# Altium PCB 8bit_RAM.PcbDoc (part 1 of 2)
Units mm, origin at the board's own origin, x right, y up, seen from the top; angles counter-clockwise.
Board outline 237.42 x 196.8 mm, 2 copper layers (Top Layer, Bottom Layer); 76 components, 66 nets, 496 pads, 273 vias.
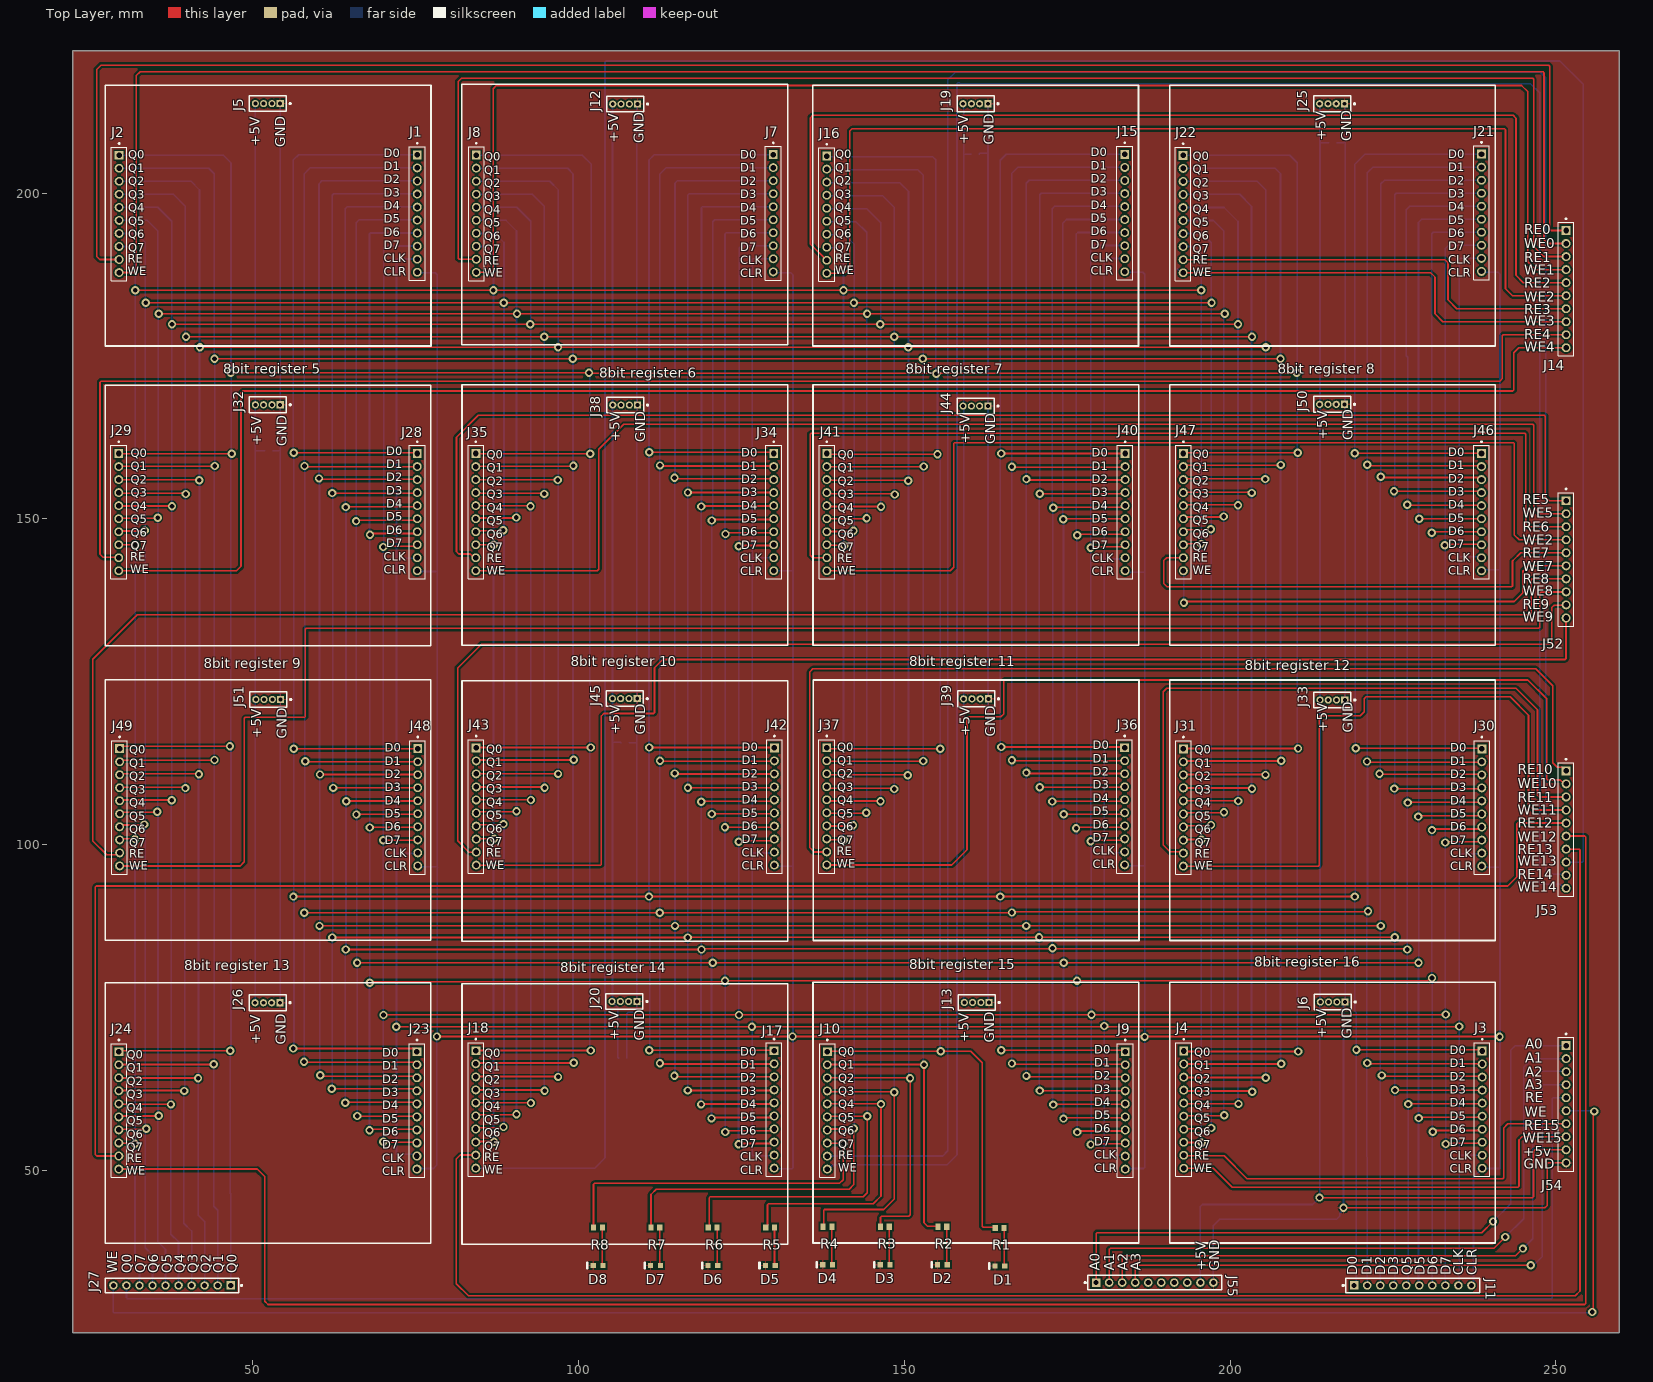
[diagram p0: Top Layer view]
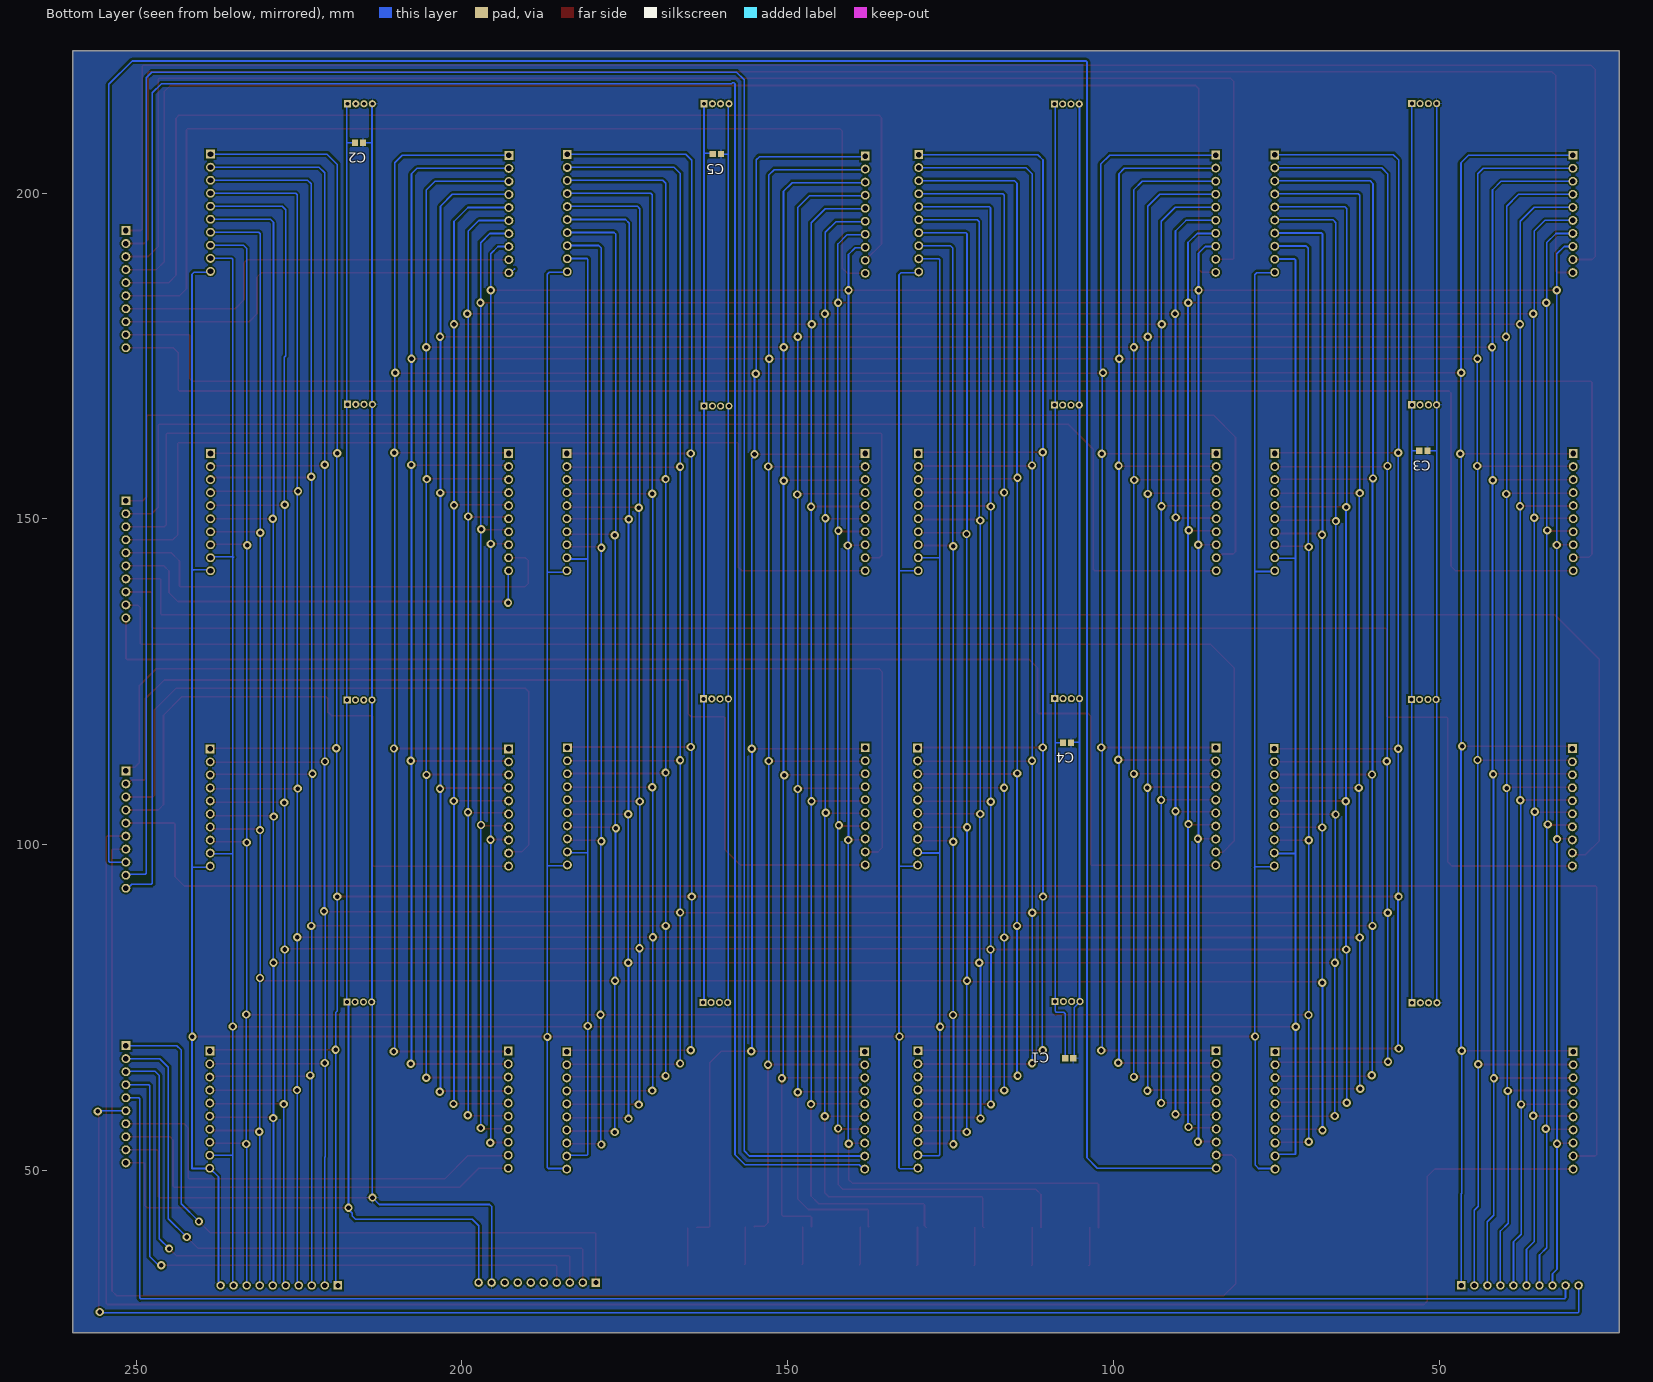
[diagram p1: Bottom Layer view, seen from below]
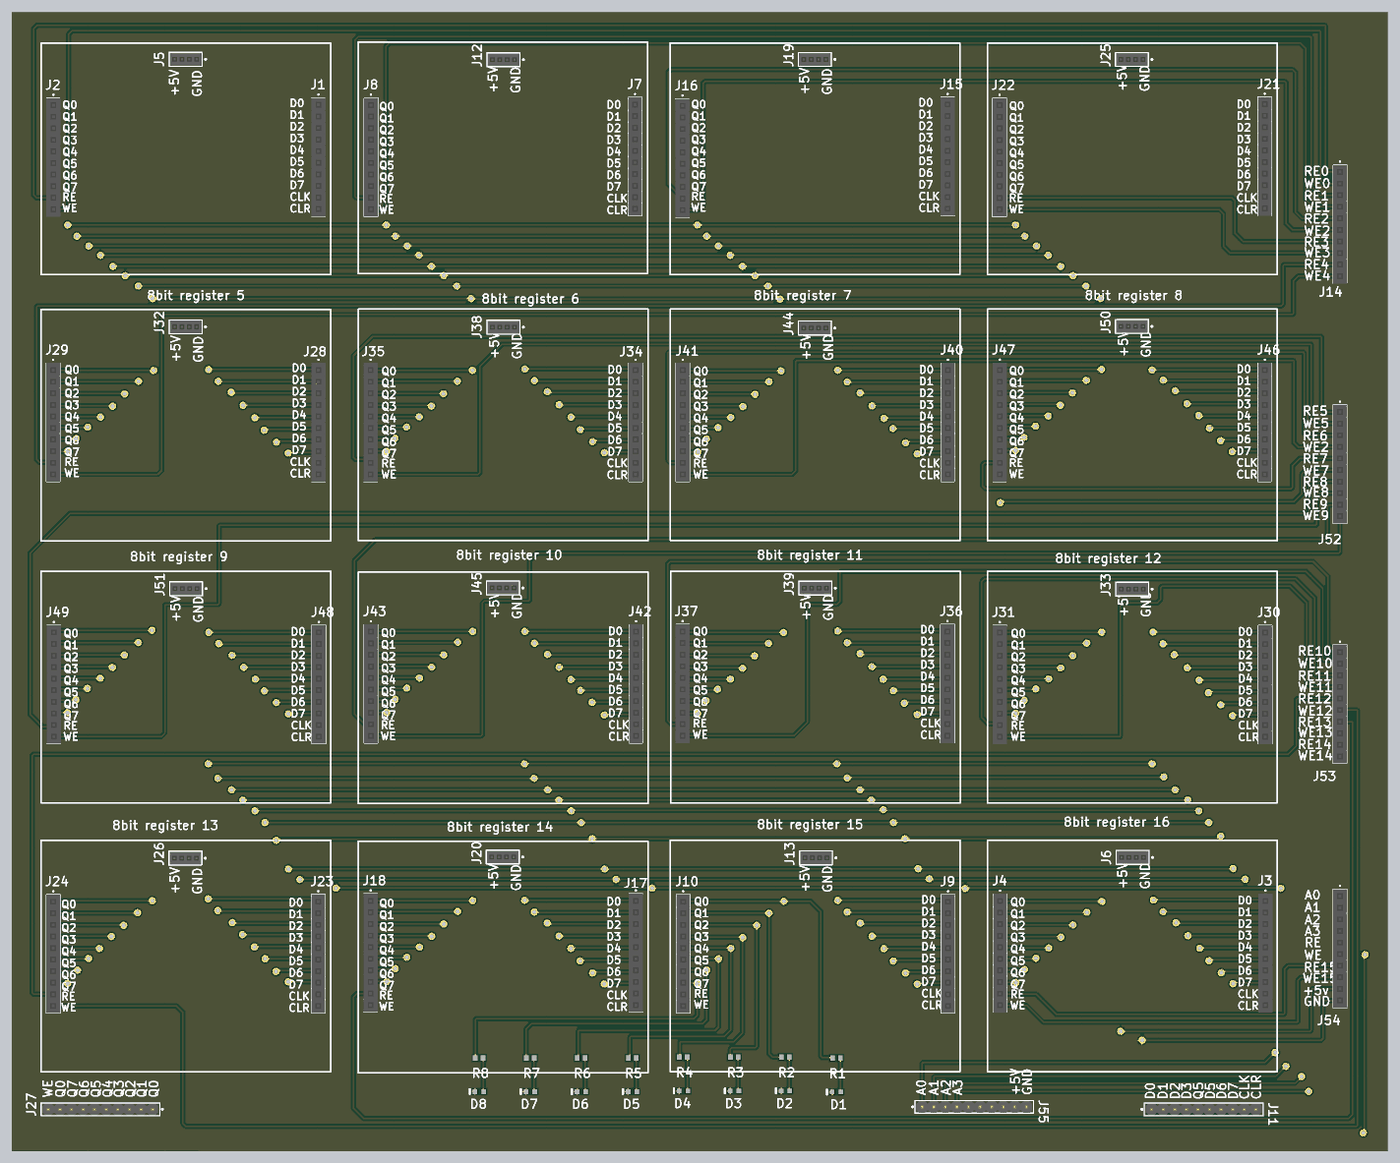
[diagram p3: 3D render of the assembled board from above, using the file's embedded part models]
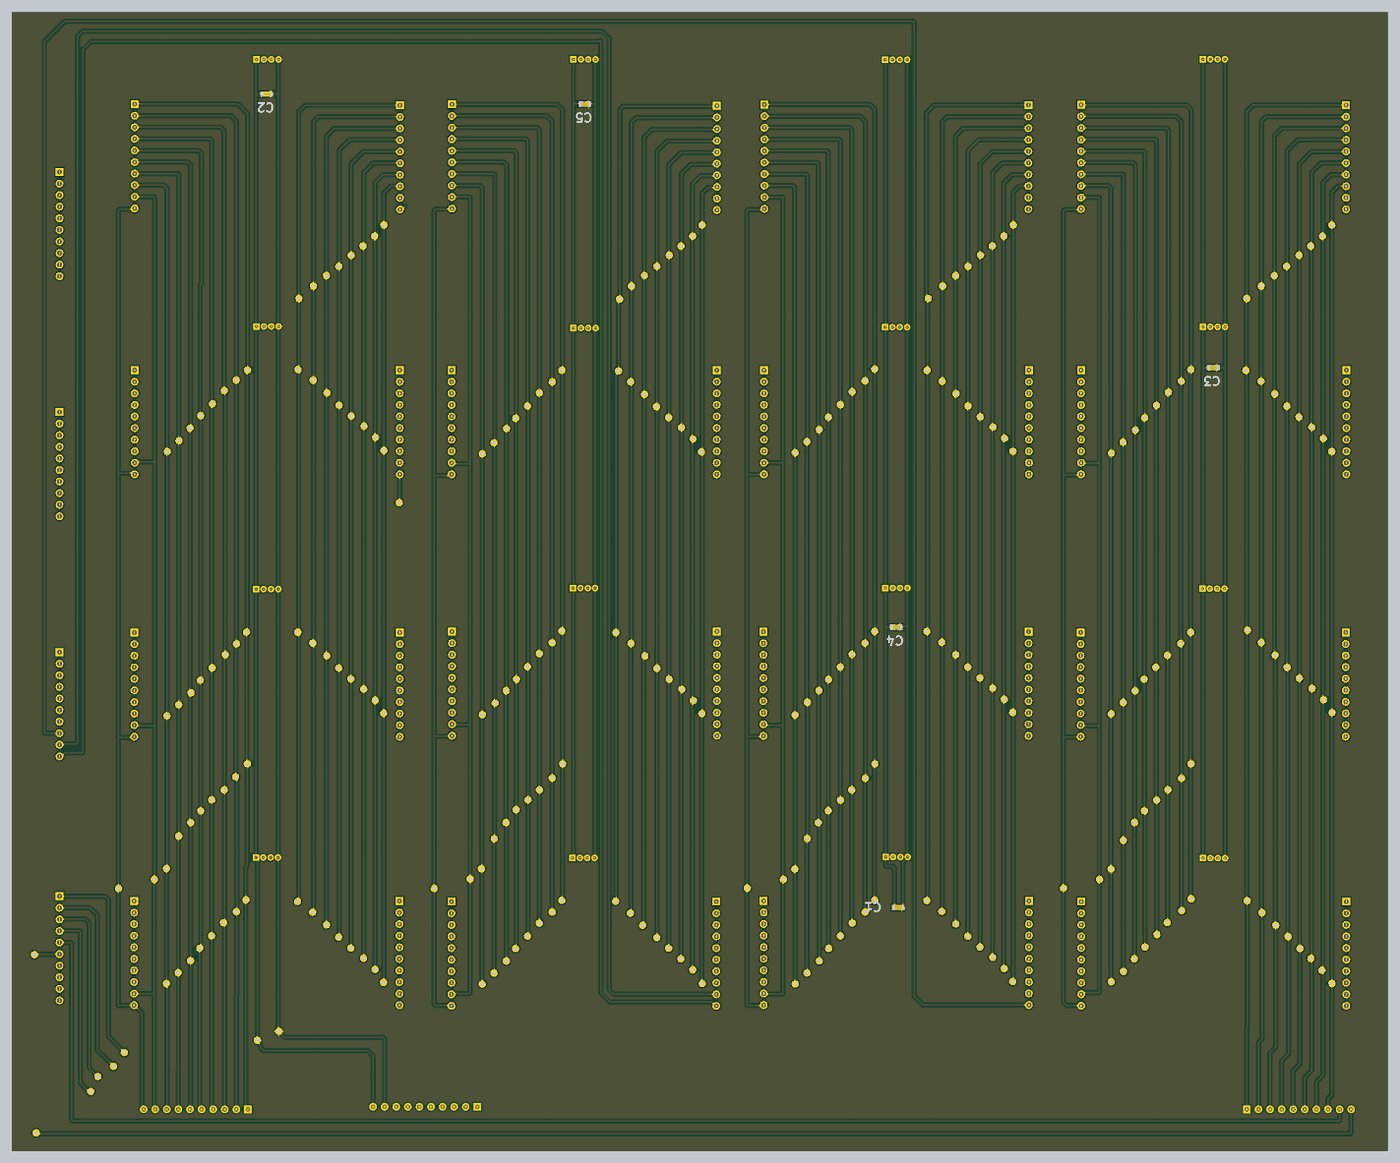
[diagram p4: 3D render of the assembled board from below, using the file's embedded part models]

## Layer stack, top to bottom
Top Solder: solder mask 0.0102, Solder Resist, Dk 3.5
Top Layer: signal copper 0.0356
Dielectric 1: dielectric 0.32, FR-4, Dk 4.8
Bottom Layer: signal copper 0.0356
Bottom Solder: solder mask 0.0102, Solder Resist, Dk 3.5

## Board outline
22.35,25.075 22.35,221.875 259.775,221.875 259.775,25.075

## Design rules (kind name [scope] priority, off if disabled: settings)
Clearance [All] p1: gap=0.254 ignorepadtopadclearanceinfootprint=FALSE
PolygonConnect [All] p1: connectstyle=Relief reliefconductorwidth=0.254 reliefentries=4 polygonreliefangle="90 Angle" airgapwidth=0.254
RoutingVias [All] p1: holewidth=0.711 width=1.27 viastyle="Through Hole" minholewidth=0.711 minwidth=1.27 maxholewidth=0.711 maxwidth=1.27
SolderMaskExpansion [All] p1: expansion=0.102 istentingtop=FALSE
SupplyNets "Schematic Supply Nets_1" [InNet('+5')] p1: voltage=0.000
SupplyNets "Schematic Supply Nets" [InNet('GND')] p2: voltage=0.000
Width [All] p1: maxlimit=0.254 minlimit=0.254 preferedwidth=0.254
30 further rules are at their usual default settings.

## Components (designator, comment, footprint, x,y, rotation, side; value= is the part's Value field where it differs from the comment)
C1 "Capacitor 100 nF +/-10% 50 V 0603" CAPC1608X90X40NL10T20 106.8,67.2 r180 bottom value=100nF
C2 "Capacitor 100 nF +/-10% 50 V 0603" CAPC1608X90X40NL10T20 215.8,207.725 r0 bottom value=100nF
C3 "Capacitor 100 nF +/-10% 50 V 0603" CAPC1608X90X40NL10T20 52.45,160.45 r0 bottom value=100nF
C4 "Capacitor 100 nF +/-10% 50 V 0603" CAPC1608X90X40NL10T20 107.15,115.625 r0 bottom value=100nF
C5 "Capacitor 100 nF +/-10% 50 V 0603" CAPC1608X90X40NL10T20 160.875,205.975 r0 bottom value=100nF
D1 "19-217/R6C-AL1M2VY/3T" EVRL-0603-2_V 164.675,35.325 r180 top
D2 "19-217/R6C-AL1M2VY/3T" EVRL-0603-2_V 155.867,35.525 r180 top
D3 "19-217/R6C-AL1M2VY/3T" EVRL-0603-2_V 147.059,35.525 r180 top
D4 "19-217/R6C-AL1M2VY/3T" EVRL-0603-2_V 138.251,35.525 r180 top
D5 "19-217/R6C-AL1M2VY/3T" EVRL-0603-2_V 129.443,35.4 r180 top
D6 "19-217/R6C-AL1M2VY/3T" EVRL-0603-2_V 120.636,35.4 r180 top
D7 "19-217/R6C-AL1M2VY/3T" EVRL-0603-2_V 111.828,35.4 r180 top
D8 "19-217/R6C-AL1M2VY/3T" EVRL-0603-2_V 103.02,35.4 r180 top
J1 "NPPN101BFCN-RC" SULLINS_NPPN101BFCN-RC 75.25,196.85 r90 top
J2 "NPPN101BFCN-RC" SULLINS_NPPN101BFCN-RC 29.5,196.8 r90 top
J3 "NPPN101BFCN-RC" SULLINS_NPPN101BFCN-RC 238.7,59.325 r90 top
J4 "NPPN101BFCN-RC" SULLINS_NPPN101BFCN-RC 192.9,59.325 r90 top
J5 "LPPB041NFFN-RC" FP-LPPB041NFFN-RC-MFG 52.315,213.725 r180 top
J6 "LPPB041NFFN-RC" FP-LPPB041NFFN-RC-MFG 215.765,75.85 r180 top
J7 "NPPN101BFCN-RC" SULLINS_NPPN101BFCN-RC 129.9,196.9 r90 top
J8 "NPPN101BFCN-RC" SULLINS_NPPN101BFCN-RC 84.325,196.825 r90 top
J9 "NPPN101BFCN-RC" SULLINS_NPPN101BFCN-RC 183.925,59.2 r90 top
J10 "NPPN101BFCN-RC" SULLINS_NPPN101BFCN-RC 138.2,59.2 r90 top
J11 "NRPN101PAEN-RC" FP-NRPN101PAEN-RC-MFG 228.05,32.339 r0 top
J12 "LPPB041NFFN-RC" FP-LPPB041NFFN-RC-MFG 107.175,213.65 r180 top
J13 "LPPB041NFFN-RC" FP-LPPB041NFFN-RC-MFG 161.125,75.775 r180 top
J14 "NPPN101BFCN-RC" SULLINS_NPPN101BFCN-RC 251.575,185.252 r90 top
J15 "NPPN101BFCN-RC" SULLINS_NPPN101BFCN-RC 183.85,196.925 r90 top
J16 "NPPN101BFCN-RC" SULLINS_NPPN101BFCN-RC 138.1,196.675 r90 top
J17 "NPPN101BFCN-RC" SULLINS_NPPN101BFCN-RC 130.025,59.35 r90 top
J18 "NPPN101BFCN-RC" SULLINS_NPPN101BFCN-RC 84.25,59.35 r90 top
J19 "LPPB041NFFN-RC" FP-LPPB041NFFN-RC-MFG 160.94,213.7 r180 top
J20 "LPPB041NFFN-RC" FP-LPPB041NFFN-RC-MFG 107.065,75.925 r180 top
J21 "NPPN101BFCN-RC" SULLINS_NPPN101BFCN-RC 238.6,196.975 r90 top
J22 "NPPN101BFCN-RC" SULLINS_NPPN101BFCN-RC 192.8,196.775 r90 top
J23 "NPPN101BFCN-RC" SULLINS_NPPN101BFCN-RC 75.216,59.207 r90 top
J24 "NPPN101BFCN-RC" SULLINS_NPPN101BFCN-RC 29.466,59.207 r90 top
J25 "LPPB041NFFN-RC" FP-LPPB041NFFN-RC-MFG 215.665,213.7 r180 top
J26 "LPPB041NFFN-RC" FP-LPPB041NFFN-RC-MFG 52.281,75.732 r180 top
J27 "NRPN101PAEN-RC" FP-NRPN101PAEN-RC-MFG 37.625,32.339 r180 top
J28 "NPPN101BFCN-RC" SULLINS_NPPN101BFCN-RC 75.25,151.025 r90 top
J29 "NPPN101BFCN-RC" SULLINS_NPPN101BFCN-RC 29.45,151.025 r90 top
J30 "NPPN101BFCN-RC" SULLINS_NPPN101BFCN-RC 238.65,105.7 r90 top
J31 "NPPN101BFCN-RC" SULLINS_NPPN101BFCN-RC 192.85,105.7 r90 top
J32 "LPPB041NFFN-RC" FP-LPPB041NFFN-RC-MFG 52.315,167.5 r180 top
J33 "LPPB041NFFN-RC" FP-LPPB041NFFN-RC-MFG 215.715,122.2 r180 top
J34 "NPPN101BFCN-RC" SULLINS_NPPN101BFCN-RC 129.975,151.025 r90 top
J35 "NPPN101BFCN-RC" SULLINS_NPPN101BFCN-RC 84.25,151.025 r90 top
J36 "NPPN101BFCN-RC" SULLINS_NPPN101BFCN-RC 183.825,105.875 r90 top
J37 "NPPN101BFCN-RC" SULLINS_NPPN101BFCN-RC 138.1,105.875 r90 top
J38 "LPPB041NFFN-RC" FP-LPPB041NFFN-RC-MFG 107.175,167.45 r180 top
J39 "LPPB041NFFN-RC" FP-LPPB041NFFN-RC-MFG 161.025,122.375 r180 top
J40 "NPPN101BFCN-RC" SULLINS_NPPN101BFCN-RC 183.9,151.025 r90 top
J41 "NPPN101BFCN-RC" SULLINS_NPPN101BFCN-RC 138.125,151.025 r90 top
J42 "NPPN101BFCN-RC" SULLINS_NPPN101BFCN-RC 130.075,105.85 r90 top
J43 "NPPN101BFCN-RC" SULLINS_NPPN101BFCN-RC 84.3,105.85 r90 top
J44 "LPPB041NFFN-RC" FP-LPPB041NFFN-RC-MFG 160.94,167.3 r180 top
J45 "LPPB041NFFN-RC" FP-LPPB041NFFN-RC-MFG 107.115,122.4 r180 top
J46 "NPPN101BFCN-RC" SULLINS_NPPN101BFCN-RC 238.6,151.025 r90 top
J47 "NPPN101BFCN-RC" SULLINS_NPPN101BFCN-RC 192.85,151.025 r90 top
J48 "NPPN101BFCN-RC" SULLINS_NPPN101BFCN-RC 75.325,105.725 r90 top
J49 "NPPN101BFCN-RC" SULLINS_NPPN101BFCN-RC 29.575,105.725 r90 top
J50 "LPPB041NFFN-RC" FP-LPPB041NFFN-RC-MFG 215.665,167.575 r180 top
J51 "LPPB041NFFN-RC" FP-LPPB041NFFN-RC-MFG 52.39,122.275 r180 top
J52 "NPPN101BFCN-RC" SULLINS_NPPN101BFCN-RC 251.575,143.781 r90 top
J53 "NPPN101BFCN-RC" SULLINS_NPPN101BFCN-RC 251.575,102.31 r90 top
J54 "NPPN101BFCN-RC" SULLINS_NPPN101BFCN-RC 251.575,60.152 r90 top
J55 "NRPN101PAEN-RC" FP-NRPN101PAEN-RC-MFG 188.45,32.775 r0 top
R1 "ERJ-3RQFR56V" RESC1608X55X30NL15T15 164.65,41.175 r0 top
R2 "ERJ-3RQFR56V" RESC1608X55X30NL15T15 155.842,41.35 r0 top
R3 "ERJ-3RQFR56V" RESC1608X55X30NL15T15 147.034,41.35 r0 top
R4 "ERJ-3RQFR56V" RESC1608X55X30NL15T15 138.226,41.35 r0 top
R5 "ERJ-3RQFR56V" RESC1608X55X30NL15T15 129.418,41.225 r0 top
R6 "ERJ-3RQFR56V" RESC1608X55X30NL15T15 120.611,41.225 r0 top
R7 "ERJ-3RQFR56V" RESC1608X55X30NL15T15 111.803,41.225 r0 top
R8 "ERJ-3RQFR56V" RESC1608X55X30NL15T15 102.995,41.225 r0 top

## Footprints (in the part's own frame and the unit in brackets; to place one, negate y for a bottom-side part, rotate by r counter-clockwise, add the part's x,y. Pads: shape width x height; smd on the part's side, far side on the other; paste and mask are expansions set on the pad)
CAPC1608X90X40NL10T20 [mm] "Chip Capacitor, 2-Leads, Body 1.70x0.90mm, IPC Medium Density"
  rect 0.95x0.95 smd: 1(-0.625,0) 2(0.625,0)
  body extent -0.85,-0.45 0.85,0.45, height 0.9
EVRL-0603-2_V [mm] "SMD, 2-Leads, Body 1.6x0.8mm"
  rect 0.8x0.8 smd: 1(-0.75,0) 2(0.75,0)
  silkscreen extent 1.65,-0.4 1.65,0.4, body extent -0.8,-0.4 0.8,0.4, height 0.5
FP-LPPB041NFFN-RC-MFG [mm]
  rect 1.1x1.1 hole 0.6 paste-2539.97 mask+0: 1(-1.905,0)
  round 1.1 hole 0.6 paste-2539.97 mask+0: 2(-0.635,0) 3(0.635,0) 4(1.905,0)
  silkscreen extent -3.57,-1.2 2.84,1.2, body extent -2.94,-1.3 2.94,1.3, height 0.25
FP-NRPN101PAEN-RC-MFG [mm]
  rect 1.3x1.3 hole 0.8 paste-2539.97 mask+0: 1(-9,0)
  round 1.3 hole 0.8 paste-2539.97 mask+0: 2(-7,0) 3(-5,0) 4(-3,0) 5(-1,0) 6(1,0) 7(3,0) 8(5,0) 9(7,0) 10(9,0)
  silkscreen extent -10.8,-1.1 10.25,1.1, body extent -10.35,-1.2 10.35,1.2, height 0.25
RESC1608X55X30NL15T15 [mm] "Chip Resistor, 2-Leads, Body 1.60x0.80mm, IPC Medium Density"
  rect 0.8x0.95 smd: 1(-0.675,0) 2(0.675,0)
  body extent -0.87,-0.48 0.87,0.48, height 0.55
SULLINS_NPPN101BFCN-RC [mm]
  rect 1.358x1.358 / inner round 1.358 / far side rect 1.358x1.358 hole 0.85: 1(9,0)
  round 1.358 hole 0.85: 2(7,0) 3(5,0) 4(3,0) 5(1,0) 6(-1,0) 7(-3,0) 8(-5,0) 9(-7,0) 10(-9,0)
  silkscreen extent -10.25,-1.2 10.9,1.2, body extent -10.25,-1.2 10.25,1.2, height 4.4

## Part data
C1 C2 C3 C4 C5: library part CMP-001-00017-6, "Chip Capacitor, 100 nF, +/- 10%, 50 V, 0603 (1608 Metric)", Capacitor Type=Ceramic, Case/Package=0603, Max Operating Temperature=125°C, Min Operating Temperature=-55°C, Tolerance=10%, Voltage Rating=50V, Mounting Technology=SM, Pins=2, RoHS Compliant=True
D1 D2 D3 D4 D5 D6 D7 D8: library part CMP-007-00004-2, "Chip LED, Red, 5 V, 25 mA, -40 to 85 degC, 2-Pin SMD (0603), RoHS, Tape and Reel", Case/Package=0603, Colour=Red, Forward Voltage=2.2V, Manufacturer="Everlight Electronics", Package Description="2-Pin Surface Mount Device, Body 1.6 x 0.8 mm", Datasheet URL=https://datasheet.ciiva.com/4688/el-19-217-r6c-al1m2vy-3tpdf-187026-4688713.pdf, Datasheet Version="Rev. 1, 01/2005", Lens Style=Clear, Manufacturer URL=http://www.everlight.com/, Mounting Technology=SM, Package Reference=0603, RoHS Compliant=False
J1 J2 J3 J4 J7 J8 J9 J10 J14 J15 J16 J17 J18 J21 J22 J23 J24 J28 J29 J30 J31 J34 J35 J36 J37 J40 J41 J42 J43 J46 J47 J48 J49 J52 J53 J54: library part CMP-003-000000-1, "10 Position Header Connector 0.079 (2.00mm) Through Hole Gold", Package=None, Check_prices=https://www.snapeda.com/parts/NPPN101BFCN-RC/Sullins/view-part/?ref=eda, Component Type=Standard, Design Item ID=NPPN101BFCN-RC, MF="Sullins Connector", MP=NPPN101BFCN-RC, Pin Count=10, SnapEDA_Link=https://www.snapeda.com/parts/NPPN101BFCN-RC/Sullins/view-part/?ref=snap, Source=NPPN101BFCN-RC.SchLib
J5 J6 J12 J13 J19 J20 J25 J26 J32 J33 J38 J39 J44 J45 J50 J51: library part CMP-25680-000035-1, "CONN HDR 4POS 0.05 GOLD PCB", Package Quantity=1, Connector Type=Header, Contact Plating=Gold, Contact Type="Female Socket", Lead Free="Lead Free", Mount="Through Hole", Number of Positions=4, Number Of Rows=1, Packaging=Bulk, Pitch=0.05inch, RoHS Compliant=Yes, Termination=Solder
J11 J27 J55: library part CMP-25680-000006-1, "CONN HEADER VERT 10POS 2MM", Current Rating=2A, Manufacturer=Sullins, Package=0, Temperature="-40°C to +105°C", Temperature Range High=+105°C, Temperature Range Low=-40°C, Voltage Rating=150V, Automotive=No, Category=Conn, ComponentLink2Description=Datasheet, ComponentLink2URL=https://s3.amazonaws.com/catalogspreads-pdf/PAGE104-105%202mm%20MALE%20HDR%20ST%20RA%20SMT.pdf, Conn Gender=Male, Conn Orientation=Straight, Contact Material=Gold,Nickel, Device Class L1=Connectors, Device Class L2="Headers and Wire Housings", Device Class L3=unset, Digikey Description="CONN HEADER VERT 10POS 2MM", Footprint Url=https://drawings-pdf.s3.amazonaws.com/10531.pdf, Height=5.95mm, Lead Free=Yes, Manufacturer Part Number=NRPN101PAEN-RC, Number Of Contacts=10, Number Of Rows=1, Octopart=https://octopart.com/nrpn101paen-rc-sullins-18674398, Pitch=2mm, RoHS=TRUE
R1 R2 R3 R4 R5 R6 R7 R8: library part CMP-2000-00858-1, Manufacturer=Panasonic, Part Number=ERJ-3RQFR56V

## Via types
v1: diameter 1.27, hole 0.711, Top Layer to Bottom Layer, 273 vias

## Nets (pads, with @x,y where several pads share a name; then routed paths per layer and width w, separated by ;. In a path a pad name is that pad's centre, name@x,y a point inside that pad or via, vN(x,y) a via of type N, cw(c..) or ccw(c..) an arc to the next point about the centre after c; other vN are vias at no path point)
+5: C1.2 C2.1 C3.1 C4.1 C5.1 J5.4 J6.4 J12.4 J13.4 J19.4 J20.4 J25.4 J26.4 J32.4 J33.4 J38.4 J39.4 J44.4 J45.4 J50.4 J51.4 J54.9 J55.9 | length 671.8
  Top Layer w0.254: v1(213.725,45.825) 246.426,45.825 246.575,45.974 246.575,52.903 246.824,53.152 J54.9@251.575,53.152
  Bottom Layer w0.254: J26.4@50.376,75.732 50.393,75.749 50.393,160.45 ; J5.4@50.41,213.725 50.393,213.708 50.393,160.45 ; C3.1@51.825,160.45 50.393,160.45 ; J12.4@105.27,213.65 105.215,213.595 105.215,115.725 ; C1.2@106.175,67.2 106.025,67.35 106.025,75.013 105.16,75.878 J20.4@105.16,75.925 105.215,75.98 105.215,115.725 ; C4.1@106.525,115.625 106.425,115.725 105.215,115.725 ; J19.4@159.035,213.7 159.127,213.608 159.127,205.975 ; J13.4@159.22,75.775 159.127,75.867 159.127,205.975 ; C5.1@160.25,205.975 159.128,205.975 ; J55.9@195.45,32.775 195.45,44.45 195.775,44.775 212.675,44.775 v1(213.725,45.825) 213.793,45.893 213.793,75.782 J6.4@213.86,75.85 213.81,75.9 213.81,207.875 ; J25.4@213.76,213.7 213.81,213.65 213.81,207.875 ; C2.1@215.175,207.725 213.96,207.725 213.81,207.875 ; J54.9@251.575,53.152 J54.9@251.674,53.251
A0: J54.1 J55.1 | length 105.4
  Top Layer w0.254: J55.1@179.45,32.775 179.45,40.276 179.599,40.425 238.65,40.425 v1(240.375,42.15)
  Bottom Layer w0.254: v1(240.375,42.15) 243.1,44.875 243.1,68.476 243.776,69.152 J54.1@251.575,69.152
A1: J54.2 J55.2 | length 101
  Top Layer w0.254: J55.2@181.45,32.775 181.45,37.876 181.599,38.025 240.5,38.025 v1(242.25,39.775)
  Bottom Layer w0.254: v1(242.25,39.775) 245.075,42.6 245.075,65.85 246.377,67.152 J54.2@251.575,67.152
A2: J54.3 J55.3 | length 98.6
  Top Layer w0.254: J55.3@183.45,32.775 183.45,36.726 183.599,36.875 243.825,36.875 v1(244.95,38)
  Bottom Layer w0.254: v1(244.95,38) 246.475,39.525 246.475,64.575 247.125,65.225 251.502,65.225 J54.3@251.575,65.152
A3: J54.4 J55.4 | length 95.5
  Top Layer w0.254: J55.4@185.45,32.775 185.45,35.276 185.599,35.425 v1(246.175,35.425)
  Bottom Layer w0.254: v1(246.175,35.425) 246.369,35.619 246.769,35.619 247.925,36.775 247.925,63.003 248.074,63.152 J54.4@251.575,63.152
CLK: J1.9 J3.9 J7.9 J9.9 J11.9 J15.9 J17.9 J21.9 J23.9 J28.9 J30.9 J34.9 J36.9 J40.9 J42.9 J46.9 J48.9 | length 786.5
  Top Layer w0.254: v1(72.05,72.05) 72.062,72.062 235.187,72.062 v1(235.2,72.075)
  Bottom Layer w0.254: 72.05,52.649 72.075,52.624 ; 72.075,52.5 72.075,52.624 ; 72.1,143.825 72.2,143.925 J28.9@75.4,143.925 ; 72.125,98.525 72.225,98.625 J48.9@75.425,98.625 ; J23.9@75.325,52.5 72.199,52.5 72.075,52.624 ; J1.9@75.5,189.875 72.224,189.875 72.075,189.726 72.075,52.624 ; 126.675,98.6 126.775,98.7 J42.9@129.975,98.7 ; J17.9@129.95,52.25 126.824,52.25 126.675,52.399 126.675,143.925 ; J34.9@129.975,144.025 126.775,144.025 126.675,143.925 ; J7.9@130.1,189.9 126.824,189.9 126.675,189.751 126.675,143.925 ; J9.9@183.9,52.3 180.849,52.3 180.7,52.449 v1(180.7,72.15) 180.675,72.175 180.675,98.675 ; J36.9@183.975,98.775 180.775,98.775 180.675,98.675 ; J40.9@183.975,143.825 180.775,143.825 180.675,143.725 ; J15.9@184.1,189.95 180.824,189.95 180.675,189.801 180.675,143.725 ; J11.9@235.05,32.339 235.2,32.488 235.2,52.2 ; 235.05,144.1 235.15,144.2 235.175,144.2 ; 235.2,98.575 J30.9@238.4,98.575 ; J46.9@238.35,144.2 235.175,144.2 ; J3.9@238.5,52.3 235.3,52.3 235.2,52.2 ; J21.9@238.6,189.975 235.324,189.975 235.175,189.826 235.175,144.2 ; 180.675,98.675 180.675,143.725 ; 235.175,144.2 235.175,72.1 v1(235.2,72.075) 235.2,52.3 235.2,52.2
  other v1: 126.625,72.05
CLR: J1.10 J3.10 J7.10 J9.10 J11.10 J15.10 J17.10 J21.10 J23.10 J28.10 J30.10 J34.10 J36.10 J40.10 J42.10 J46.10 J48.10 | length 778
  Top Layer w0.254: v1(78.275,70.55) 78.288,70.538 241.362,70.538 v1(241.375,70.525)
  Bottom Layer w0.254: J23.10@75.25,50.3 77.75,50.3 78.275,50.825 v1(78.275,70.55) ; J28.10@75.4,141.925 78.225,141.925 78.325,141.825 ; J48.10@75.425,96.625 78.25,96.625 78.325,96.55 ; J1.10@75.5,187.875 75.625,187.75 78.025,187.75 78.325,187.45 78.325,141.825 ; v1@78.325,70.55 78.325,96.55 ; 78.35,141.8 78.325,141.825 ; 78.375,96.5 78.325,96.55 ; J17.10@129.95,50.25 132.776,50.25 132.925,50.399 132.925,96.575 ; J42.10@129.975,96.7 132.8,96.7 132.925,96.575 ; J34.10@129.975,142.025 132.8,142.025 132.925,141.9 ; J7.10@130.1,187.9 130.225,187.775 132.625,187.775 132.925,187.475 132.925,141.9 ; J9.10@183.9,50.3 186.739,50.3 186.888,50.449 v1(186.888,70.487) 186.925,70.525 186.925,187.525 186.625,187.825 184.225,187.825 J15.10@184.1,187.95 ; J36.10@183.975,96.775 186.8,96.775 186.925,96.65 ; J40.10@183.975,141.825 186.8,141.825 186.925,141.7 ; J11.10@237.05,32.339 237.05,32.622 237.375,32.947 237.375,49 J3.10@238.7,50.325 ; J46.10@238.35,142.2 241.175,142.2 241.3,142.075 ; J3.10@238.6,50.3 241.425,50.3 241.425,70.475 v1(241.375,70.525) 241.425,70.575 241.425,96.45 ; J30.10@238.6,96.725 238.775,96.55 241.325,96.55 241.425,96.45 ; J21.10@238.6,187.975 238.725,187.85 241.125,187.85 241.425,187.55 241.425,96.45 ; 78.325,96.55 78.325,141.825 ; 132.925,96.575 132.925,141.9
  other v1: 132.85,70.55
D0: J1.1 J3.1 J7.1 J9.1 J11.1 J15.1 J17.1 J21.1 J23.1 J28.1 J30.1 J34.1 J36.1 J40.1 J42.1 J46.1 J48.1 | length 1054.3
  Top Layer w0.254: v1(56.225,68.7) 75.125,68.7 J23.1@75.325,68.5 ; v1(56.25,92.025) v1(110.825,92.025) v1(164.725,92.025) v1(219.15,92.025) ; v1(56.3,160.125) 75.2,160.125 J28.1@75.4,159.925 ; v1(56.325,114.725) 75.125,114.725 J48.1@75.225,114.825 ; v1(110.85,68.45) 129.75,68.45 J17.1@129.95,68.25 ; v1(110.875,114.9) 129.775,114.9 J42.1@129.975,114.7 ; v1(110.875,160.225) 129.775,160.225 J34.1@129.975,160.025 ; v1(164.875,68.425) 183.775,68.425 J9.1@183.975,68.225 ; v1(164.875,114.975) 183.775,114.975 J36.1@183.975,114.775 ; v1(164.875,160.025) 183.775,160.025 J40.1@183.975,159.825 ; v1(219.125,160.05) 238.2,160.05 J46.1@238.35,160.2 ; v1(219.3,114.775) 238.2,114.775 J30.1@238.4,114.575 ; v1(219.4,68.5) 238.3,68.5 J3.1@238.5,68.3
  Bottom Layer w0.254: v1@56.35,68.7 56.35,91.925 v1(56.25,92.025) 56.288,92.063 56.288,114.688 v1(56.325,114.725) 56.313,114.737 56.313,160.063 56.25,160.125 56.25,205.075 57.05,205.875 J1.1@75.5,205.875 ; v1@110.95,68.45 110.95,91.9 v1(110.825,92.025) 110.825,205.075 111.65,205.9 J7.1@130.1,205.9 ; v1(164.875,68.425) 164.725,68.575 v1(164.725,92.025) 164.725,205.025 165.65,205.95 J15.1@184.1,205.95 ; J11.1@219.05,32.339 219.4,32.689 219.4,74.2 219.15,74.45 v1(219.15,92.025) 219.225,92.1 219.225,114.7 v1(219.3,114.775) 219.213,114.863 219.213,159.962 v1(219.125,160.05) 219.125,204.375 220.725,205.975 J21.1@238.6,205.975
D1: J1.2 J3.2 J7.2 J9.2 J11.2 J15.2 J17.2 J21.2 J23.2 J28.2 J30.2 J34.2 J36.2 J40.2 J42.2 J46.2 J48.2 | length 1025.7
  Top Layer w0.254: v1(57.875,66.675) 57.962,66.587 75.237,66.587 J23.2@75.325,66.5 ; v1(57.9,89.525) 112.35,89.525 112.475,89.65 112.575,89.55 166.425,89.55 v1@166.525,89.65 ; v1(57.95,158.1) 58.038,158.012 75.312,158.012 J28.2@75.4,157.925 ; v1(58.05,112.8) 58.138,112.712 J48.2@75.338,112.712 ; v1(112.5,66.425) 112.588,66.337 129.862,66.337 J17.2@129.95,66.25 ; v1(112.525,112.875) 112.613,112.787 129.887,112.787 J42.2@129.975,112.7 ; v1(112.525,158.2) 112.613,158.113 129.887,158.113 J34.2@129.975,158.025 ; v1(166.525,66.4) 166.613,66.312 183.888,66.312 J9.2@183.975,66.225 ; v1(166.525,89.575) 166.625,89.675 221.075,89.675 v1(221.175,89.775) ; v1(166.525,112.95) 166.613,112.863 183.888,112.863 J36.2@183.975,112.775 ; v1(166.525,158) 166.613,157.913 183.888,157.913 J40.2@183.975,157.825 ; v1(221.025,112.75) 221.113,112.663 238.313,112.663 J30.2@238.4,112.575 ; v1(221.05,66.475) 221.138,66.387 238.412,66.387 J3.2@238.5,66.3 ; v1(221.075,158.3) 221.213,158.162 238.313,158.162 J46.2@238.35,158.2
  Bottom Layer w0.254: v1@57.9,66.675 v1(57.9,89.525) 57.975,89.6 57.975,112.725 v1(58.05,112.8) 58,112.85 58,158 57.9,158.1 57.9,202.925 58.85,203.875 J1.2@75.5,203.875 ; v1(112.5,66.425) 112.5,89.5 v1(112.475,89.525) 112.475,202.925 113.45,203.9 J7.2@130.1,203.9 ; v1@166.5,66.4 166.5,89.55 v1(166.525,89.575) 166.5,89.6 166.5,203 167.45,203.95 J15.2@184.1,203.95 ; J11.2@221.05,32.339 221.05,52.025 221,52.075 221,89.6 v1(221.175,89.775) 221.1,89.85 221.1,112.675 v1(221.025,112.75) 221.05,112.775 221.05,158.275 v1(221.075,158.3) 221.075,203.1 221.95,203.975 J21.2@238.6,203.975
D2: J1.3 J3.3 J7.3 J9.3 J11.3 J15.3 J17.3 J21.3 J23.3 J28.3 J30.3 J34.3 J36.3 J40.3 J42.3 J46.3 J48.3 | length 989.1
  Top Layer w0.254: v1(60.175,156.2) 60.313,156.062 75.262,156.062 J28.3@75.4,155.925 ; v1(60.25,87.525) v1(114.825,87.525) v1(168.725,87.525) v1(223.15,87.525) ; v1(60.337,110.762) 75.287,110.762 J48.3@75.425,110.625 ; v1(60.375,64.6) 60.525,64.45 75,64.45 J23.3@75.15,64.6 ; v1(114.725,64.525) 114.863,64.387 129.812,64.387 J17.3@129.95,64.25 ; v1(114.75,156.3) 114.888,156.163 129.837,156.163 J34.3@129.975,156.025 ; v1(114.8,110.925) 114.888,110.837 129.837,110.837 J42.3@129.975,110.7 ; v1(168.75,64.5) 168.887,64.362 183.837,64.362 J9.3@183.975,64.225 ; v1(168.75,111.05) 168.887,110.913 183.837,110.913 J36.3@183.975,110.775 ; v1(168.75,156.1) 168.887,155.963 183.837,155.963 J40.3@183.975,155.825 ; v1(222.95,110.875) 223.025,110.8 238.175,110.8 J30.3@238.4,110.575 ; v1(223.125,156.475) 223.262,156.338 238.212,156.338 J46.3@238.35,156.2 ; v1(223.275,64.575) 223.413,64.438 238.362,64.438 J3.3@238.5,64.3
  Bottom Layer w0.254: v1(60.375,64.6) 60.313,64.663 60.313,87.463 v1(60.25,87.525) 60.294,87.569 60.294,110.719 v1(60.337,110.762) 60.256,110.844 60.256,156.119 v1(60.175,156.2) 60.175,201.45 60.6,201.875 J1.3@75.5,201.875 ; v1@114.825,64.456 v1(114.825,87.525) 114.813,87.537 114.813,110.913 v1(114.8,110.925) 114.775,110.95 114.775,156.25 114.825,156.3 114.825,201.525 115.2,201.9 J7.3@130.1,201.9 ; v1(168.75,64.5) 168.725,64.525 v1(168.725,87.525) 168.725,156.075 v1(168.75,156.1) 168.75,201.5 169.2,201.95 J15.3@184.1,201.95 ; J11.3@223.05,32.339 223.05,48.9 223.05,87.425 v1(223.15,87.525) 223.05,87.625 223.05,110.775 v1(222.95,110.875) 223.038,110.962 223.038,156.363 223.15,156.475 223.15,201.425 223.7,201.975 J21.3@238.6,201.975
D3: J1.4 J3.4 J7.4 J9.4 J11.4 J15.4 J17.4 J21.4 J23.4 J28.4 J30.4 J34.4 J36.4 J40.4 J42.4 J46.4 J48.4 | length 954.5
  Top Layer w0.254: v1(62.15,62.525) 62.162,62.512 75.312,62.512 J23.4@75.325,62.5 ; v1(62.2,85.75) 116.75,85.75 116.775,85.775 170.7,85.775 170.725,85.8 v1(225.3,85.8) ; v1(62.225,153.95) 62.238,153.938 75.388,153.938 J28.4@75.4,153.925 ; v1(62.35,108.7) 62.362,108.713 75.337,108.713 J48.4@75.35,108.7 ; v1(116.775,62.275) 116.788,62.263 129.938,62.263 J17.4@129.95,62.25 ; v1(116.8,108.725) 116.813,108.713 129.963,108.713 J42.4@129.975,108.7 ; v1(116.8,154.05) 116.813,154.037 129.963,154.037 J34.4@129.975,154.025 ; v1(170.8,62.25) 170.813,62.238 183.962,62.238 J9.4@183.975,62.225 ; v1(170.8,108.8) 170.813,108.787 183.962,108.787 J36.4@183.975,108.775 ; v1(170.8,153.85) 170.813,153.837 183.962,153.837 J40.4@183.975,153.825 ; v1(225.175,154.225) 225.188,154.212 238.337,154.212 J46.4@238.35,154.2 ; v1(225.225,108.6) 225.237,108.587 238.387,108.587 J30.4@238.4,108.575 ; v1(225.325,62.325) 225.338,62.312 238.488,62.312 J3.4@238.5,62.3
  Bottom Layer w0.254: v1@62.15,62.512 v1(62.15,62.525) ; v1@62.2,62.512 v1(62.2,85.75) 62.275,85.825 62.275,108.625 v1(62.35,108.7) 62.288,108.762 62.288,153.887 v1(62.225,153.95) 62.225,199.675 62.425,199.875 J1.4@75.5,199.875 ; v1@116.775,62.263 v1(116.775,62.275) v1(116.775,85.75) 116.788,85.762 116.788,108.713 v1(116.8,108.725) 116.8,154.025 116.775,154.05 116.775,199.65 117.025,199.9 J7.4@130.1,199.9 ; v1(170.8,62.25) 170.7,62.35 v1(170.7,85.8) 170.7,153.75 v1(170.8,153.85) 170.8,199.725 171.025,199.95 J15.4@184.1,199.95 ; J11.4@225.05,32.339 225.25,32.539 225.25,32.96 225.3,33.01 v1(225.3,85.8) 225.3,199.75 225.525,199.975 J21.4@238.6,199.975
D4: J1.5 J3.5 J7.5 J9.5 J11.5 J15.5 J17.5 J21.5 J23.5 J28.5 J30.5 J34.5 J36.5 J40.5 J42.5 J46.5 J48.5 | length 921.1
  Top Layer w0.254: v1(64.2,60.375) 64.263,60.438 75.262,60.438 J23.5@75.325,60.5 ; v1(64.275,151.8) 64.337,151.862 75.338,151.862 J28.5@75.4,151.925 ; v1(64.3,83.9) v1(118.875,83.9) 118.975,84 172.65,84 172.75,83.9 172.85,84 227.1,84 v1(227.2,83.9) ; v1(64.35,106.65) 64.388,106.688 75.237,106.688 J48.5@75.275,106.65 ; v1(118.825,60.125) 118.887,60.187 129.888,60.187 J17.5@129.95,60.25 ; v1(118.85,106.575) 118.912,106.637 129.913,106.637 J42.5@129.975,106.7 ; v1(118.85,151.9) 118.912,151.963 129.913,151.963 J34.5@129.975,152.025 ; v1(172.7,106.625) 172.75,106.675 183.875,106.675 J36.5@183.913,106.713 ; v1(172.85,60.1) 172.912,60.162 183.913,60.162 J9.5@183.975,60.225 ; v1(172.85,151.7) 172.912,151.763 183.913,151.763 J40.5@183.975,151.825 ; v1(227.2,152.175) 227.275,152.1 238.25,152.1 J46.5@238.35,152.2 ; v1(227.275,106.45) 227.338,106.513 238.337,106.513 J30.5@238.4,106.575 ; v1(227.375,60.175) 227.437,60.238 238.438,60.238 J3.5@238.5,60.3
  Bottom Layer w0.254: v1(64.2,60.375) 64.2,83.8 v1(64.3,83.9) 64.325,83.925 64.325,106.625 v1(64.35,106.65) 64.312,106.688 64.312,151.687 64.2,151.8 64.2,197.6 64.475,197.875 J1.5@75.5,197.875 ; v1@118.8,60.125 118.8,83.825 v1(118.875,83.9) 118.863,83.913 118.863,106.562 v1(118.85,106.575) 118.85,151.875 118.875,151.9 118.875,197.7 119.075,197.9 J7.5@130.1,197.9 ; v1(172.85,60.1) 172.75,60.2 v1(172.75,84.1) 172.725,84.125 172.725,106.6 v1(172.7,106.625) 172.775,106.7 172.775,151.525 172.7,151.6 172.727,151.627 172.727,197.602 173.075,197.95 J15.5@184.1,197.95 ; J11.5@227.048,32.34 227.048,32.62 227.375,32.947 v1(227.375,60.175) ; v1@227.2,60.175 v1(227.2,83.9) v1(227.2,152.175) 227.287,152.262 227.287,174.813 227.05,175.05 227.05,197.45 227.575,197.975 J21.5@238.6,197.975
D5: J1.6 J3.6 J7.6 J9.6 J11.6 J15.6 J17.6 J21.6 J23.6 J28.6 J30.6 J34.6 J36.6 J40.6 J42.6 J46.6 J48.6 | length 892.7
  Top Layer w0.254: v1(65.875,149.65) 66.013,149.788 75.262,149.788 J28.6@75.4,149.925 ; v1(65.925,104.625) 65.975,104.675 75.375,104.675 J48.6@75.425,104.625 ; v1(66.025,81.875) v1(120.6,81.875) v1(174.5,81.875) v1(228.925,81.875) ; v1(66.05,58.35) 66.075,58.325 75.15,58.325 J23.6@75.188,58.362 ; v1(120.425,57.975) 120.563,58.113 129.812,58.113 J17.6@129.95,58.25 ; v1(120.45,149.75) 120.588,149.887 129.837,149.887 J34.6@129.975,150.025 ; v1(120.475,104.7) 120.487,104.713 129.963,104.713 J42.6@129.975,104.7 ; v1(174.4,149.95) 174.437,149.988 183.812,149.988 J40.6@183.975,149.825 ; v1(174.45,57.95) 174.588,58.088 183.837,58.088 J9.6@183.975,58.225 ; v1(174.475,104.675) 174.513,104.637 183.837,104.637 J36.6@183.975,104.775 ; v1(228.875,104.3) 229.012,104.437 238.263,104.437 J30.6@238.4,104.575 ; v1(228.975,58.025) 229.113,58.162 238.362,58.162 J3.6@238.5,58.3 ; v1(229.05,150) 229.062,150.013 238.162,150.013 J46.6@238.35,150.2
  Bottom Layer w0.254: v1(66.05,58.35) 66.038,58.362 66.038,81.863 65.975,81.925 65.975,104.575 v1(65.925,104.625) 65.9,104.65 65.9,149.625 v1(65.875,149.65) 65.875,195.45 66.3,195.875 J1.6@75.5,195.875 ; v1(120.425,57.975) 120.425,81.7 v1(120.6,81.875) 120.537,81.938 120.537,104.637 v1(120.475,104.7) 120.462,104.713 120.462,149.613 120.6,149.75 120.6,195.6 120.9,195.9 J7.6@130.1,195.9 ; v1(174.45,57.95) 174.45,81.825 v1(174.5,81.875) 174.487,81.888 174.487,104.662 v1(174.475,104.675) 174.437,104.713 174.437,149.912 v1(174.4,149.95) 174.325,150.025 174.325,195.375 174.9,195.95 J15.6@184.1,195.95 ; J11.6@229.05,32.339 228.925,32.463 v1(228.925,81.875) 228.988,81.938 228.988,149.938 v1(229.05,150) 228.925,150.125 228.925,195.5 229.4,195.975 J21.6@238.6,195.975
D6: J1.7 J3.7 J7.7 J9.7 J11.7 J15.7 J17.7 J21.7 J23.7 J28.7 J30.7 J34.7 J36.7 J40.7 J42.7 J46.7 J48.7 | length 859.5
  Top Layer w0.254: v1(67.925,56.15) 68.1,56.325 75.15,56.325 J23.7@75.325,56.5 ; v1(67.95,78.8) 68.1,78.95 122.35,78.95 v1(122.5,79.1) v1(176.525,79.1) 230.3,79.1 230.725,79.525 v1(231,79.525) ; v1(67.975,102.625) 68.025,102.675 75.375,102.675 J48.7@75.425,102.625 ; v1(68,147.575) 68.175,147.75 75.225,147.75 J28.7@75.4,147.925 ; v1(122.475,102.65) 122.513,102.688 129.963,102.688 J42.7@129.975,102.7 ; v1(122.55,55.9) 122.725,56.075 129.775,56.075 J17.7@129.95,56.25 ; v1(122.575,147.675) 122.75,147.85 129.8,147.85 J34.7@129.975,148.025 ; v1(176.375,102.5) 176.513,102.637 183.838,102.637 J36.7@183.863,102.663 ; v1(176.575,55.875) 176.75,56.05 183.8,56.05 J9.7@183.975,56.225 ; v1(176.575,147.475) 176.75,147.65 183.8,147.65 J40.7@183.975,147.825 ; v1(230.95,147.85) 231.125,148.025 238.175,148.025 J46.7@238.35,148.2 ; v1(231,102.225) 231.175,102.4 238.225,102.4 J30.7@238.4,102.575 ; v1(231.1,55.95) 231.275,56.125 238.325,56.125 J3.7@238.5,56.3
  Bottom Layer w0.254: v1(67.925,56.15) 67.925,78.775 v1(67.95,78.8) 67.963,78.812 67.963,102.612 v1(67.975,102.625) 67.988,102.637 67.988,147.512 67.925,147.575 67.925,193.726 68.074,193.875 J1.7@75.5,193.875 ; v1@122.525,55.987 122.525,79.075 v1(122.5,79.1) 122.487,79.113 122.487,102.637 v1(122.475,102.65) 122.525,102.7 122.525,147.65 122.5,147.675 122.5,193.726 122.674,193.9 J7.7@130.1,193.9 ; v1(176.575,55.875) 176.55,55.9 176.55,79.075 v1(176.525,79.1) 176.45,79.175 176.45,102.425 v1(176.375,102.5) 176.475,102.6 176.475,147.3 176.427,147.348 176.427,193.703 176.674,193.95 J15.7@184.1,193.95 ; J11.7@231.05,32.339 231.05,38.95 231.025,38.975 231.025,79.5 v1(231,79.525) 230.975,79.55 230.975,193.776 231.174,193.975 J21.7@238.6,193.975
D7: J1.8 J3.8 J7.8 J9.8 J11.8 J15.8 J17.8 J21.8 J23.8 J28.8 J30.8 J34.8 J36.8 J40.8 J42.8 J46.8 J48.8 | length 822.6
  Top Layer w0.254: v1(70.025,54.375) 70.062,54.338 75.163,54.338 J23.8@75.2,54.375 ; v1(70.025,145.675) 70.15,145.8 75.275,145.8 J28.8@75.4,145.925 ; v1(70.05,100.65) 70.087,100.688 75.112,100.688 J48.8@75.15,100.65 ; v1(70.075,73.85) 70.112,73.887 233.088,73.887 v1(233.125,73.925) ; v1(124.575,54) 124.7,54.125 129.825,54.125 J17.8@129.95,54.25 ; v1(124.6,100.45) 124.725,100.575 129.85,100.575 J42.8@129.975,100.7 ; v1(124.6,145.775) 124.725,145.9 129.85,145.9 J34.8@129.975,146.025 ; v1(178.6,53.975) 178.725,54.1 183.85,54.1 J9.8@183.975,54.225 ; v1(178.6,100.525) 178.725,100.65 183.85,100.65 J36.8@183.975,100.775 ; v1(178.6,145.575) 178.725,145.7 183.85,145.7 J40.8@183.975,145.825 ; v1(232.975,145.95) 233.1,146.075 238.225,146.075 J46.8@238.35,146.2 ; v1(233.025,100.325) 233.15,100.45 238.275,100.45 J30.8@238.4,100.575 ; v1(233.125,54.05) 233.25,54.175 238.375,54.175 J3.8@238.5,54.3
  Bottom Layer w0.254: v1@70.1,54.3 v1(70.025,54.375) 70.05,54.4 70.05,73.8 70.1,73.85 70.062,73.887 70.062,100.637 70.038,100.662 70.038,145.613 70.1,145.675 70.1,191.55 70.425,191.875 J1.8@75.5,191.875 ; v1(124.575,54) 124.575,73.775 v1(124.65,73.85) ; v1@124.7,73.85 124.625,73.925 124.625,100.425 v1(124.6,100.45) 124.6,145.675 124.7,145.775 124.7,191.575 125.025,191.9 J7.8@130.1,191.9 ; v1@178.7,53.975 178.7,73.85 v1(178.75,73.9) 178.7,73.95 178.7,100.525 178.6,100.625 v1(178.6,145.575) 178.6,191.525 179.025,191.95 J15.8@184.1,191.95 ; J11.8@233.05,32.339 233.05,53.975 v1(233.125,54.05) v1(233.125,73.925) 233.025,74.025 v1(233.025,100.325) 233.025,191.475 233.525,191.975 J21.8@238.6,191.975
GND: C1.1 C2.2 C3.2 C4.2 C5.2 D1.2 D2.2 D3.2 D4.2 D5.2 D6.2 D7.2 D8.2 J5.1 J6.1 J12.1 J13.1 J19.1 J20.1 J25.1 J26.1 J32.1 J33.1 J38.1 J39.1 J44.1 J45.1 J50.1 J51.1 J54.10 J55.10 | length 669.7
  Top Layer w0.254: v1(217.425,44.275) 248.326,44.275 248.675,44.624 248.675,51.003 248.824,51.152 J54.10@251.575,51.152
  Bottom Layer w0.254: C3.2@53.075,160.45 54.12,160.45 54.22,160.55 ; J26.1@54.186,75.732 54.22,75.766 54.22,160.55 ; J5.1@54.22,213.725 J32.1@54.22,167.5 54.22,160.55 ; C1.1@107.425,67.2 107.425,74.05 107.65,74.275 108.775,74.275 108.97,74.47 J20.1@108.97,75.925 108.97,115.625 ; C4.2@107.775,115.625 108.97,115.625 ; J12.1@109.08,213.65 108.97,213.54 108.97,115.625 ; C5.2@161.5,205.975 161.625,206.1 162.845,206.1 ; J19.1@162.845,213.7 162.845,206.1 ; J13.1@163.03,75.775 162.845,75.96 J44.1@162.845,167.3 162.845,206.1 ; J55.10@197.45,32.775 197.45,32.95 197.575,33.075 197.45,33.2 197.45,41.525 198.425,42.5 216.35,42.5 216.85,43 216.85,43.425 217.425,44 v1(217.425,44.275) 217.425,75.605 J6.1@217.67,75.85 217.67,207.825 ; C2.2@216.425,207.725 217.57,207.725 217.67,207.825 ; J25.1@217.57,213.7 217.67,213.6 217.67,207.825 ; J54.10@251.575,51.152 J54.10@251.674,51.251
NetD1_1: D1.1 R1.2 | length 5.9
  Top Layer w0.254: R1.2@165.325,41.175 165.325,35.425 D1.1@165.425,35.325
NetD2_1: D2.1 R2.2 | length 5.9
  Top Layer w0.254: R2.2@156.517,41.35 156.517,35.625 D2.1@156.617,35.525
NetD3_1: D3.1 R3.2 | length 5.9
  Top Layer w0.254: R3.2@147.709,41.35 147.709,35.625 D3.1@147.809,35.525
NetD4_1: D4.1 R4.2 | length 5.9
  Top Layer w0.254: R4.2@138.901,41.35 138.901,35.625 D4.1@139.001,35.525
NetD5_1: D5.1 R5.2 | length 5.9
  Top Layer w0.254: R5.2@130.093,41.225 130.093,35.5 D5.1@130.193,35.4
NetD6_1: D6.1 R6.2 | length 5.9
  Top Layer w0.254: R6.2@121.285,41.225 121.285,35.5 D6.1@121.385,35.4
NetD7_1: D7.1 R7.2 | length 5.9
  Top Layer w0.254: R7.2@112.478,41.225 112.478,35.5 D7.1@112.578,35.4
NetD8_1: D8.1 R8.2 | length 5.9
  Top Layer w0.254: R8.2@103.67,41.225 103.67,35.5 D8.1@103.77,35.4
Q0: J2.1 J4.1 J8.1 J10.1 J16.1 J18.1 J22.1 J24.1 J27.1 J29.1 J31.1 J35.1 J37.1 J41.1 J43.1 J47.1 J49.1 R1.1 | length 1058.3
  Top Layer w0.254: J24.1@29.325,68.175 29.525,68.375 v1(46.575,68.375) ; J49.1@29.45,114.85 29.693,115.093 v1(46.507,115.093) ; J29.1@29.5,159.975 v1(46.8,159.975) ; v1(46.65,172.4) v1(101.625,172.4) 101.688,172.338 154.837,172.338 v1(154.9,172.275) 154.963,172.338 210.188,172.338 v1(210.25,172.4) ; J35.1@84.475,160.05 84.525,160 v1(101.825,160) ; J18.1@84.525,68.45 84.575,68.4 v1(101.875,68.4) ; J43.1@84.525,114.95 84.575,114.9 v1(101.875,114.9) ; J10.1@137.775,68.275 v1(155.6,68.275) 160.225,68.275 161.975,66.525 161.975,41.45 162.15,41.275 163.875,41.275 R1.1@163.975,41.175 ; J37.1@138.175,114.75 138.225,114.7 v1(155.525,114.7) ; J41.1@138.25,159.95 138.3,159.9 v1(155.1,159.9) ; J47.1@193.05,160.2 193.1,160.15 v1(210.4,160.15) ; J31.1@193.1,114.8 193.15,114.75 v1(210.45,114.75) ; J4.1@193.125,68.3 193.175,68.25 v1(210.475,68.25)
  Bottom Layer w0.254: J2.1@29.5,205.8 45.525,205.8 46.675,204.65 46.675,172.4 46.725,172.35 46.725,160.025 46.653,159.953 46.653,115.115 v1@46.675,115.093 ; v1(46.507,115.093) v1@46.675,115.093 ; J27.1@46.625,32.339 46.625,46.4 46.575,46.45 v1(46.575,68.375) 46.662,68.462 46.662,115.081 v1@46.675,115.093 ; J8.1@84.575,205.8 100.6,205.8 101.95,204.45 101.95,173 101.625,172.675 v1(101.625,172.4) ; v1@101.75,68.4 101.75,114.9 101.75,160 v1@101.75,172.4 ; J16.1@138.303,205.593 154.328,205.593 154.825,205.095 154.825,172.35 155.094,172.081 155.094,171.624 155.1,171.618 155.1,159.625 155.525,159.2 155.525,114.747 155.478,114.7 v1@155.478,68.275 ; J22.1@193.128,205.793 209.153,205.793 210.303,204.643 210.303,114.75 v1@210.303,68.25
Q1: J2.2 J4.2 J8.2 J10.2 J16.2 J18.2 J22.2 J24.2 J27.2 J29.2 J31.2 J35.2 J37.2 J41.2 J43.2 J47.2 J49.2 R2.1 | length 1009.3
  Top Layer w0.254: J24.2@29.275,66.225 29.313,66.263 43.988,66.263 v1(44.025,66.3) ; J49.2@29.4,112.9 29.437,112.937 44.112,112.937 v1(44.15,112.975) ; J29.2@29.487,158.062 44.162,158.062 v1(44.2,158.1) ; v1(44.15,174.55) v1(99.125,174.55) v1(152.85,174.55) v1(207.75,174.55) ; J35.2@84.475,158.05 84.513,158.088 99.188,158.088 v1(99.225,158.125) ; J18.2@84.525,66.45 84.562,66.487 99.237,66.487 v1(99.275,66.525) ; J43.2@84.525,112.95 84.562,112.987 99.237,112.987 v1(99.275,113.025) ; J10.2@137.688,66.287 137.713,66.263 152.988,66.263 v1(153.025,66.225) 153.025,41.975 153.6,41.4 155.117,41.4 R2.1@155.167,41.35 ; J37.2@138.175,112.75 138.212,112.787 152.887,112.787 v1(152.925,112.825) ; J41.2@138.25,157.95 138.288,157.987 152.963,157.987 v1(153,158.025) ; J47.2@193.05,158.2 193.087,158.237 207.763,158.237 v1(207.8,158.275) ; J31.2@193.1,112.8 193.137,112.837 207.812,112.837 v1(207.85,112.875) ; J4.2@193.125,66.3 193.162,66.337 207.837,66.337 v1(207.875,66.375)
  Bottom Layer w0.254: J2.2@29.5,203.8 43.275,203.8 44.1,202.975 44.1,174.55 44.175,174.475 44.175,158.125 v1(44.2,158.1) 44.1,158 44.1,66.375 v1(44.025,66.3) 44.025,44.475 44.625,43.875 J27.2@44.625,32.339 ; v1@44.125,113 v1(44.15,112.975) ; J8.2@84.575,203.8 98.35,203.8 99.175,202.975 v1@99.175,158.075 ; v1@99.125,158.025 v1@99.175,158.075 ; v1@99.175,66.425 v1(99.275,66.525) v1@99.25,66.55 ; v1@99.175,66.525 v1@99.175,112.925 ; v1@99.2,158.15 v1(99.225,158.125) v1@99.175,158.075 ; v1@99.25,113.05 v1(99.275,113.025) v1@99.175,112.925 ; J16.2@138.303,203.593 152.078,203.593 152.903,202.768 v1@152.903,157.928 ; v1@152.9,157.925 v1@152.903,157.928 ; v1@152.925,66.325 v1(152.925,112.825) 152.903,112.847 v1@152.903,157.928 ; v1@152.975,158.05 v1(153,158.025) v1@152.903,157.928 ; J22.2@193.128,203.793 206.903,203.793 207.75,202.945 v1(207.75,174.55) 207.75,158.325 v1(207.8,158.275) 207.75,158.225 207.75,112.975 v1(207.85,112.875) ; v1@207.775,112.817 207.75,112.792 207.75,66.5 v1(207.875,66.375) ; v1@99.175,112.925 v1@99.175,158.075
Q2: J2.3 J4.3 J8.3 J10.3 J16.3 J18.3 J22.3 J24.3 J27.3 J29.3 J31.3 J35.3 J37.3 J41.3 J43.3 J47.3 J49.3 R3.1 | length 969
  Top Layer w0.254: J24.3@29.275,64.225 29.325,64.175 41.575,64.175 v1(41.625,64.125) ; J49.3@29.4,110.9 29.45,110.85 41.7,110.85 v1(41.75,110.8) ; J29.3@29.5,155.975 41.75,155.975 v1(41.8,155.925) ; v1(41.9,176.35) v1(96.875,176.35) v1(150.6,176.35) v1(205.5,176.35) ; J35.3@84.475,156.05 84.525,156 96.775,156 v1(96.825,155.95) ; J18.3@84.525,64.45 84.575,64.4 96.825,64.4 v1(96.875,64.35) ; J43.3@84.525,110.95 84.575,110.9 96.825,110.9 v1(96.875,110.85) ; J10.3@137.712,64.187 137.737,64.213 150.812,64.213 v1(150.9,64.125) 150.9,43.2 150.675,42.975 146.508,42.975 146.359,42.826 R3.1@146.359,41.35 ; J37.3@138.175,110.75 138.225,110.7 150.475,110.7 v1(150.525,110.65) ; J41.3@138.25,155.95 138.3,155.9 150.55,155.9 v1(150.6,155.85) ; J47.3@193.05,156.2 193.1,156.15 205.35,156.15 v1(205.4,156.1) ; J31.3@193.1,110.8 193.15,110.75 205.4,110.75 v1(205.45,110.7) ; J4.3@193.125,64.3 193.175,64.25 205.425,64.25 v1(205.475,64.2)
  Bottom Layer w0.254: J2.3@29.5,201.8 40.525,201.8 41.85,200.475 41.85,110.8 41.687,110.638 41.687,64.187 v1(41.625,64.125) 41.625,43.1 42.625,42.1 J27.3@42.625,32.339 ; J8.3@84.575,201.8 95.6,201.8 96.925,200.475 v1@96.925,64.35 ; J16.3@138.303,201.593 149.328,201.593 150.653,200.268 150.653,110.65 150.713,110.59 150.713,64.312 v1(150.9,64.125) ; J22.3@193.128,201.793 204.153,201.793 205.478,200.468 v1@205.478,64.2